# Altium PCB UC-521.PcbDoc
Units mil, origin at the board's own origin, x right, y up, seen from the top; angles counter-clockwise.
Board outline 1574.8 x 1574.8 mil, 4 copper layers (Top Layer, VCC_3.3V, InternalPlane2, Bottom Layer); 61 components, 37 nets, 286 pads, 160 vias.
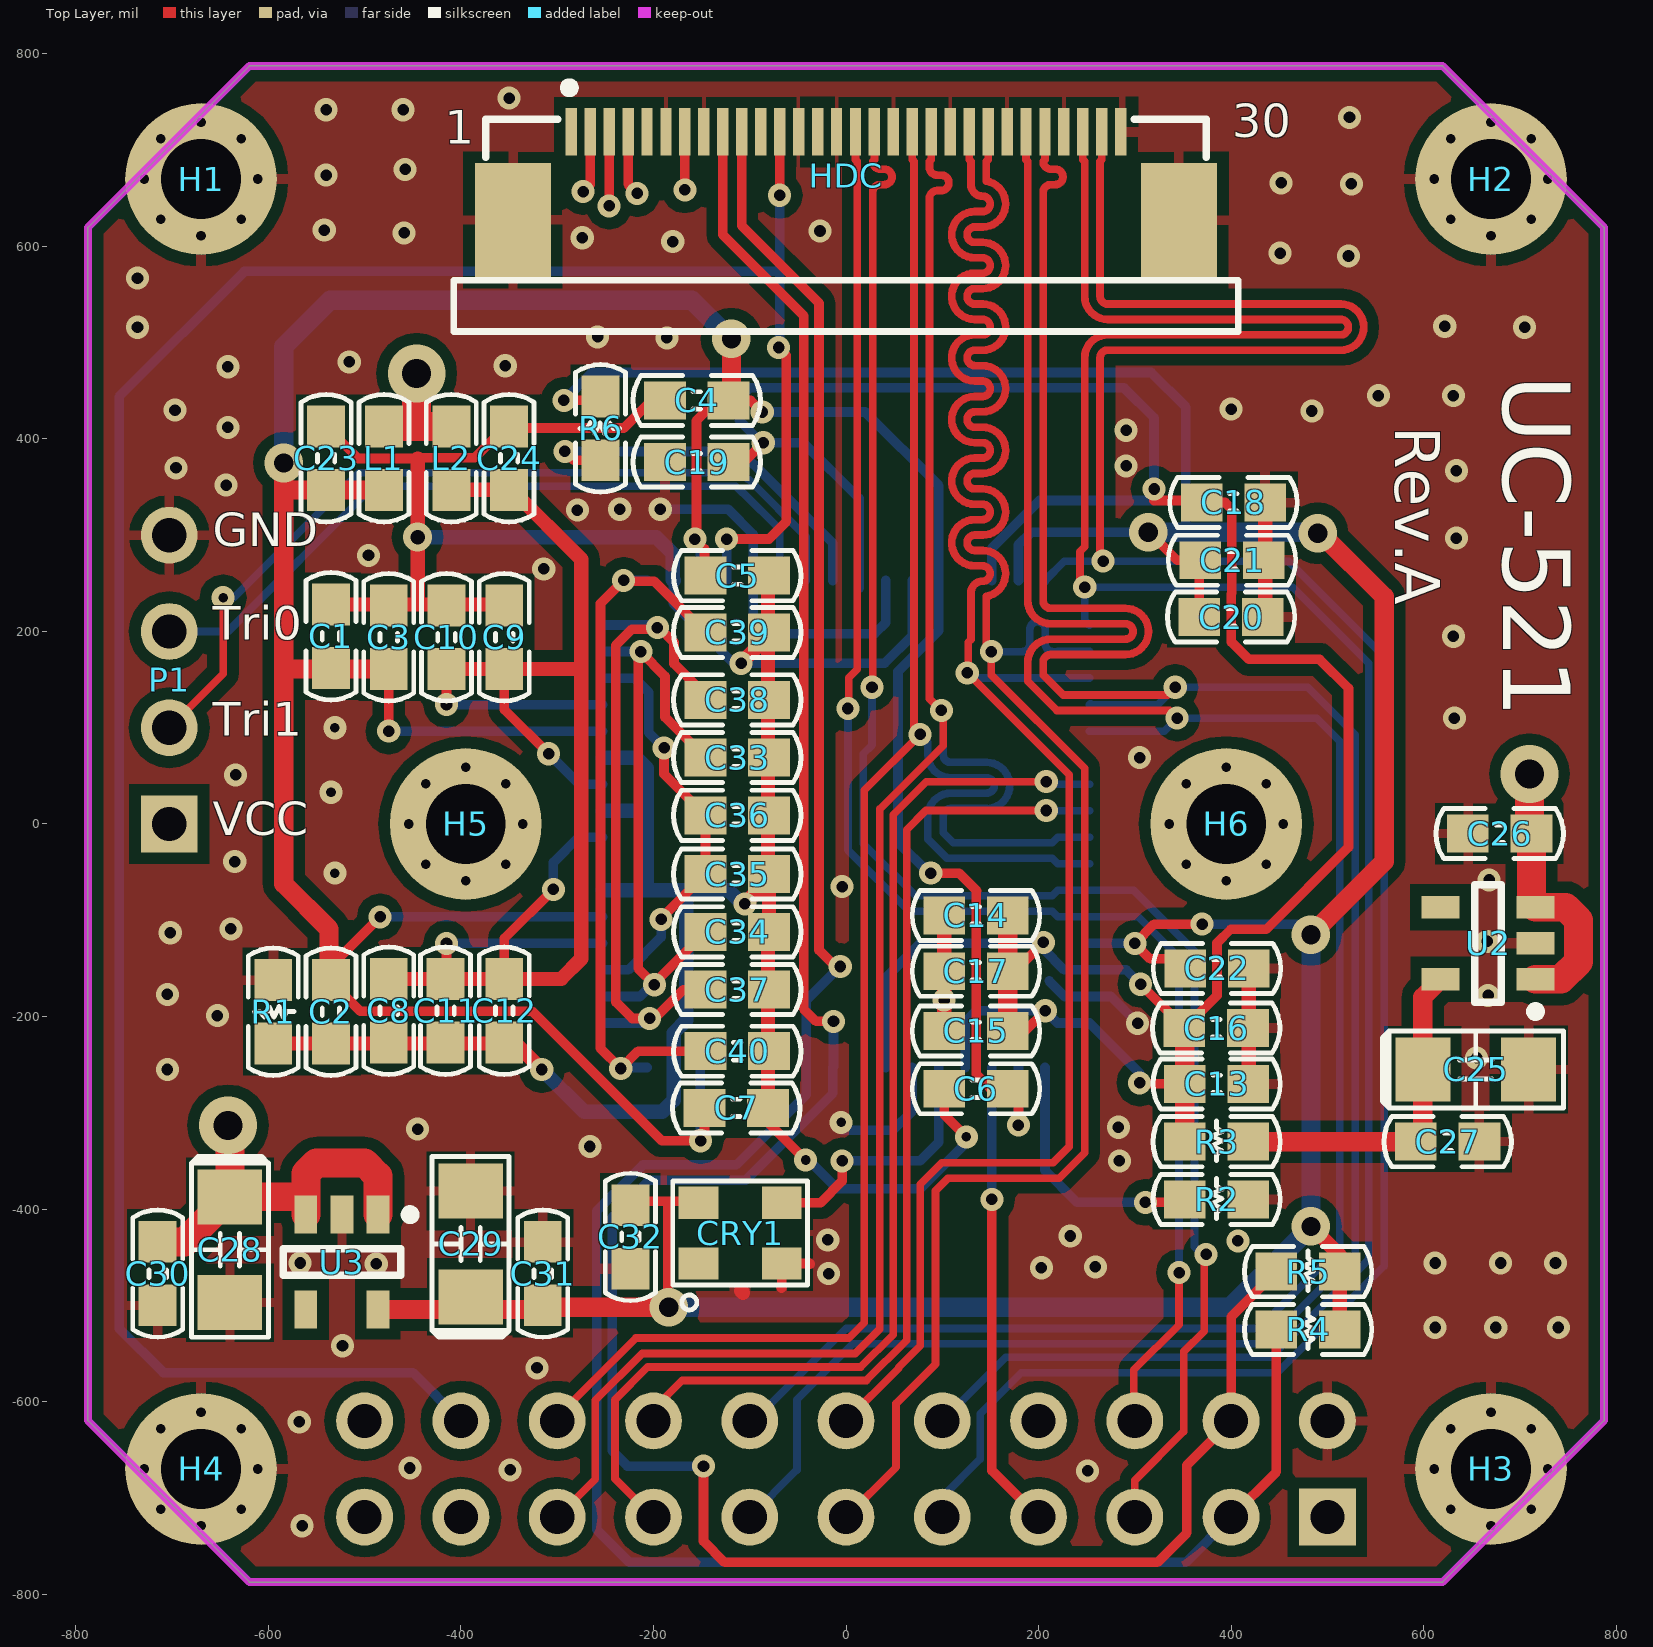
[diagram p0: Top Layer view]
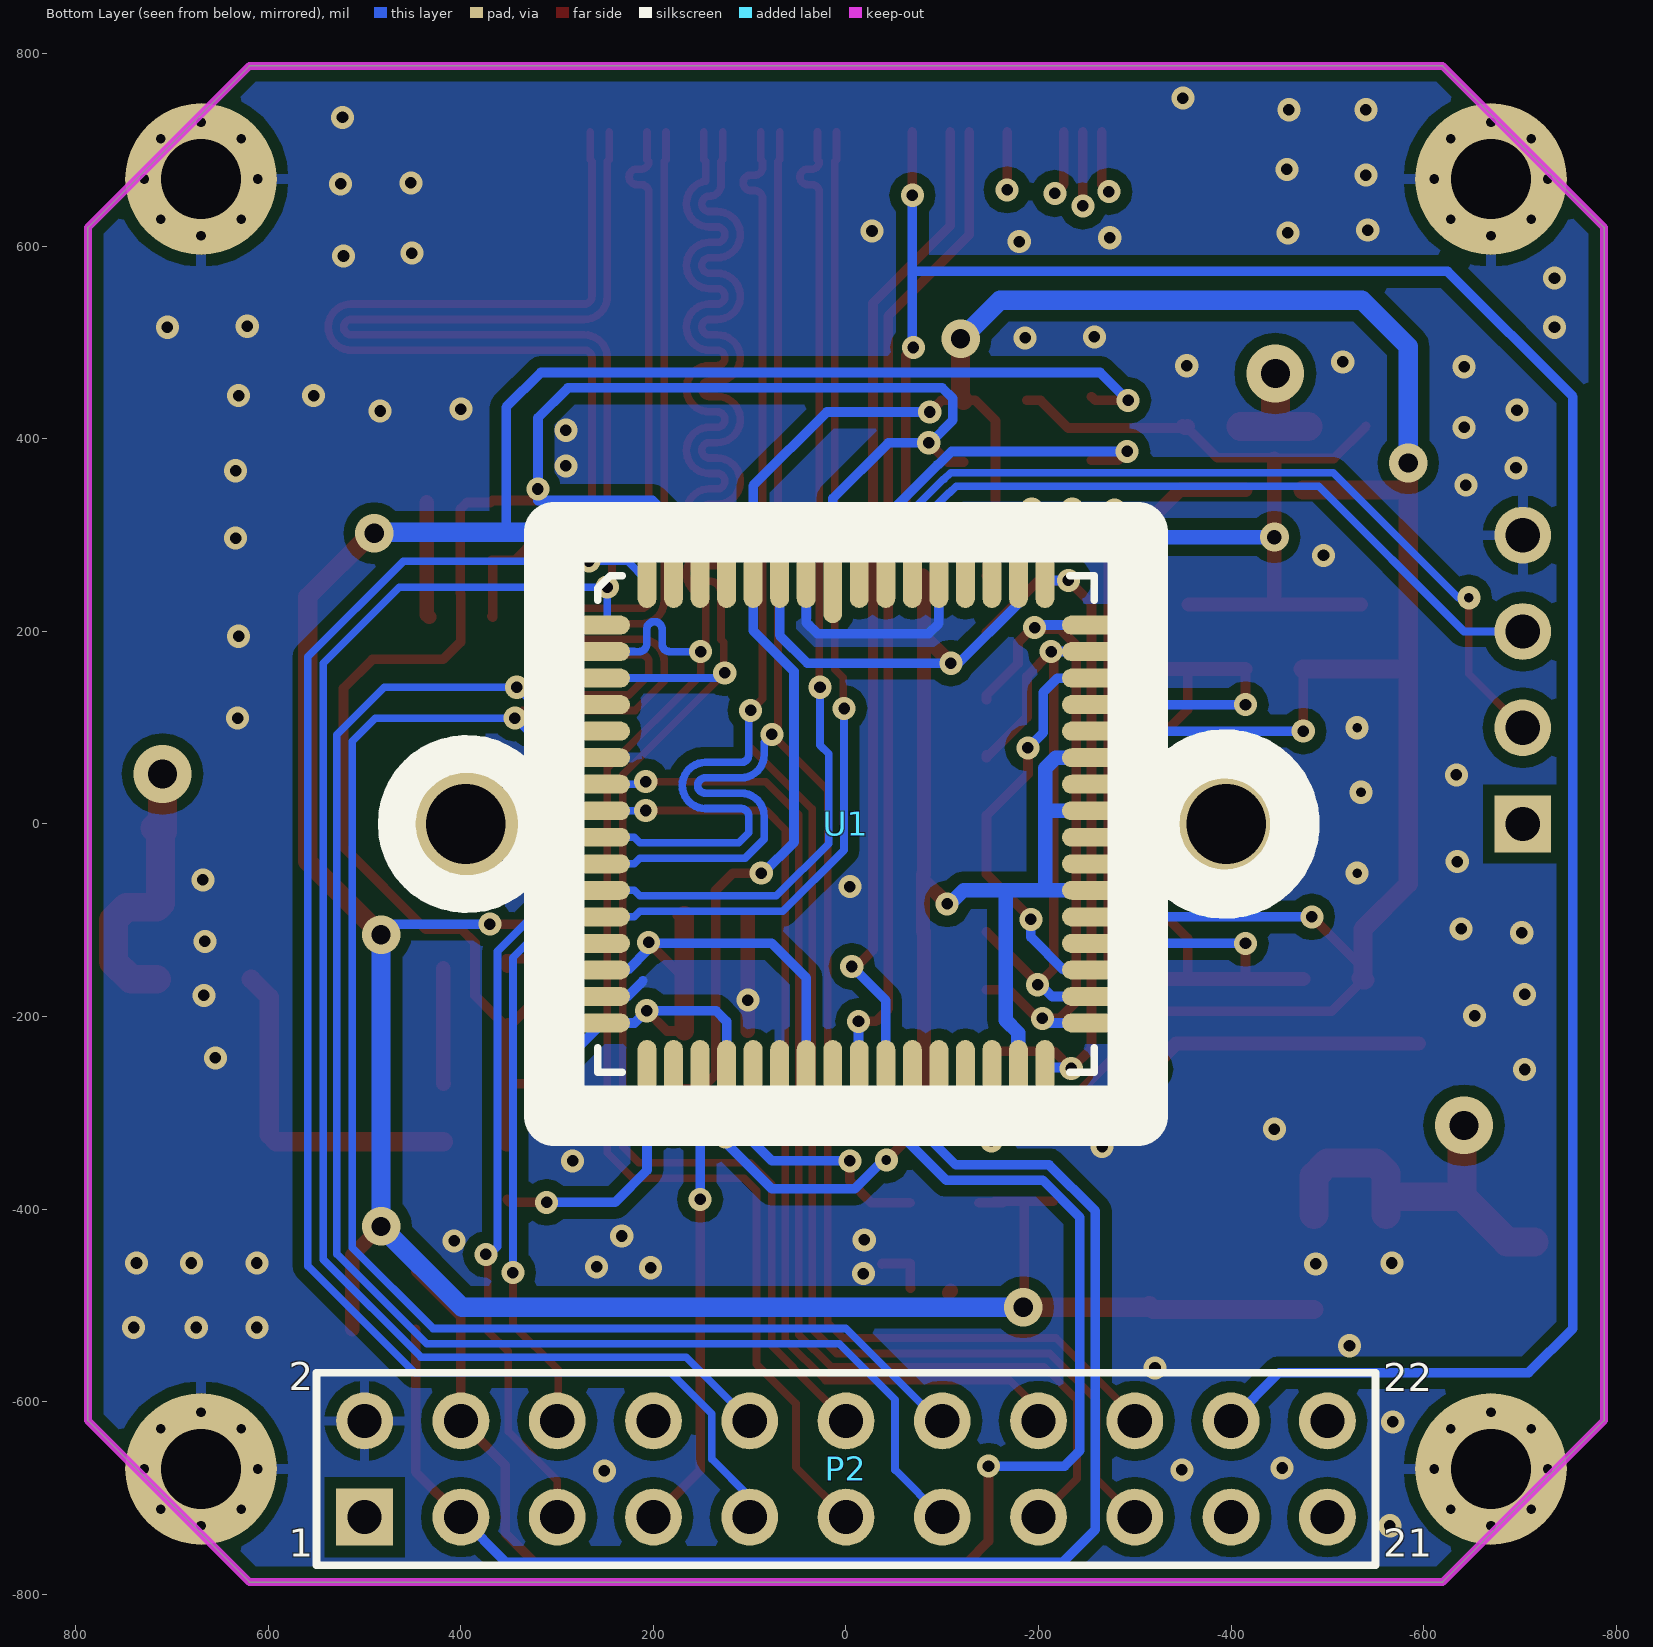
[diagram p1: Bottom Layer view, seen from below]
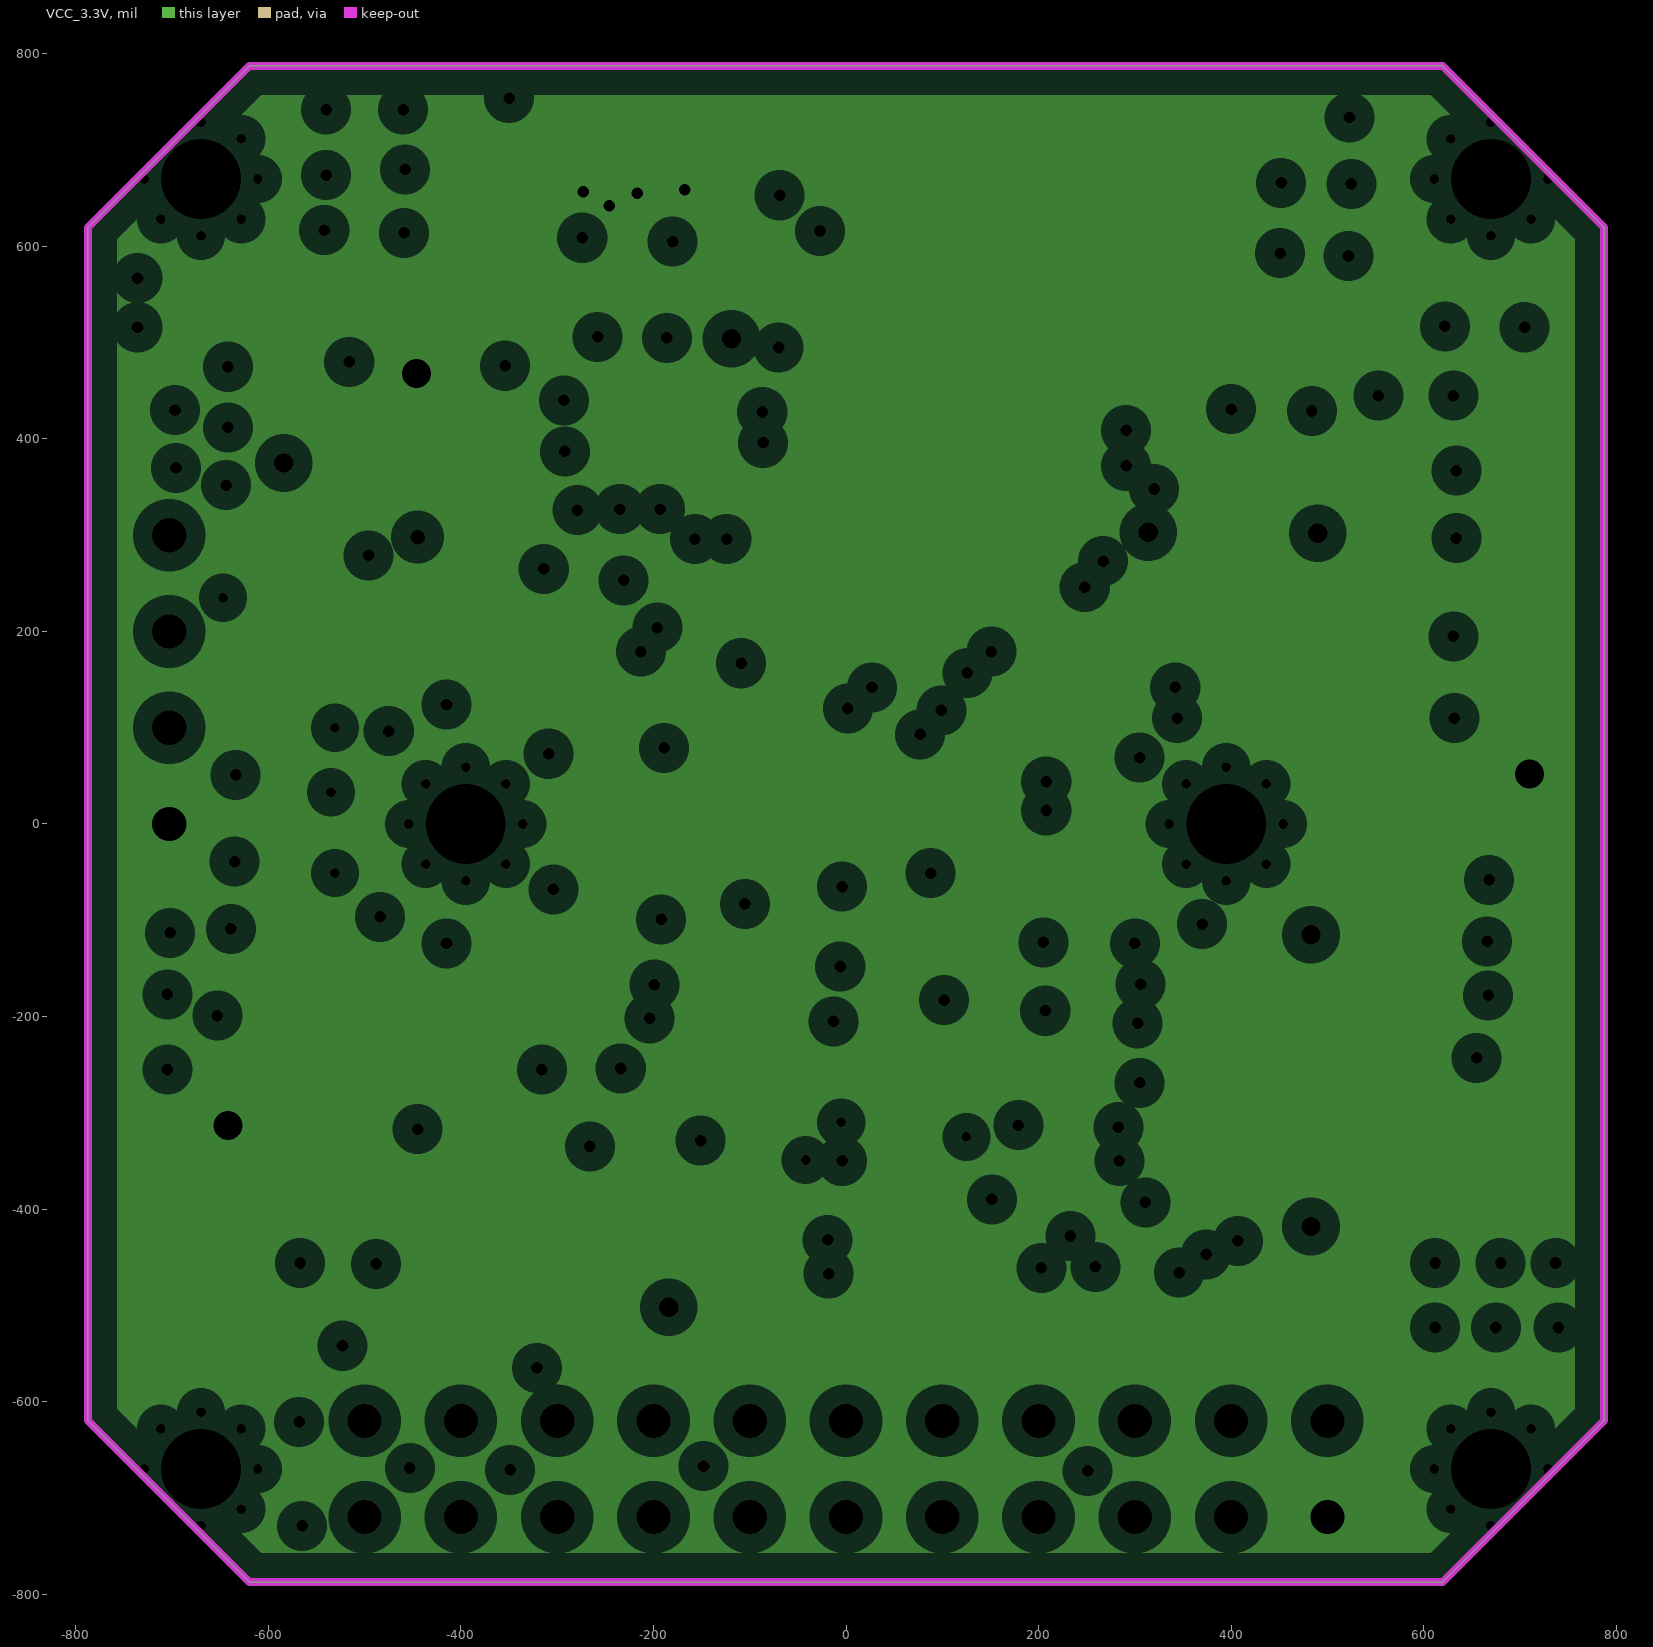
[diagram p2: VCC_3.3V, clearances drawn from the general rule]
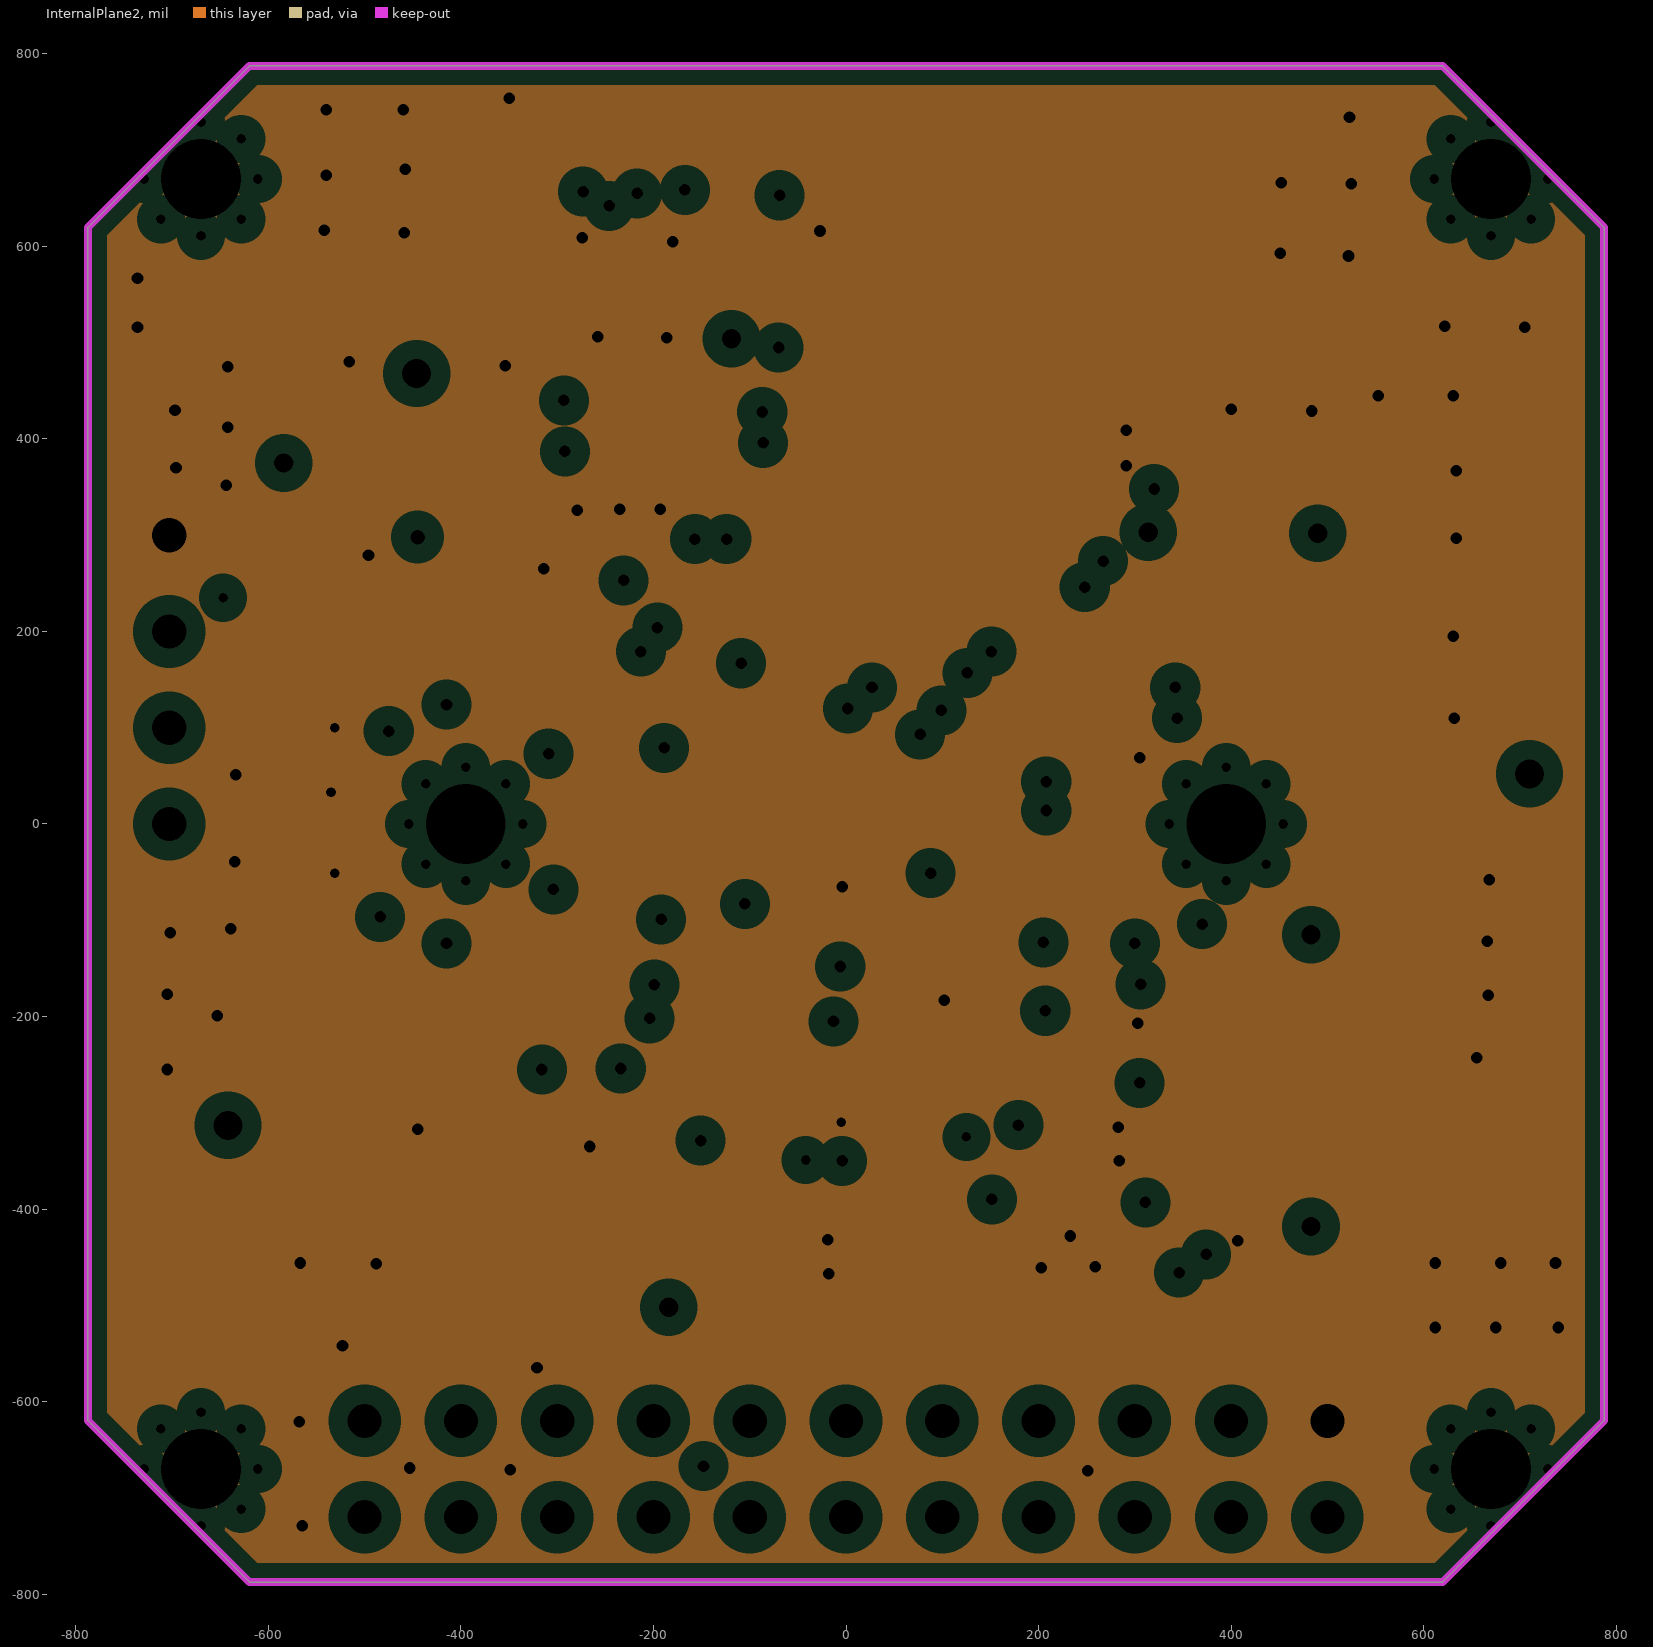
[diagram p3: InternalPlane2, clearances drawn from the general rule]

## Layer stack, top to bottom
Top Layer: signal copper 1.4
Dielectric: core 12.6, FR-4, Dk 4.8
VCC_3.3V: plane copper 1.4, net VCC_3.3V
Dielectric: prepreg 12.6, FR-4, Dk 4.8
InternalPlane2: plane copper 1.4, net DGND
Dielectric: core 12.6, FR-4, Dk 4.8
Bottom Layer: signal copper 1.4

## Board outline
-787.4,-619.68 -787.4,619.68 -619.68,787.4 619.69,787.4 787.4,619.68 787.4,-619.68 619.69,-787.4 -619.68,-787.4

## Design rules (kind name [scope] priority, off if disabled: settings)
Clearance 铺铜安全间距 [InPolygon] p1: gap=12 // Protel DXP Scope 1 Expression Was: inpolygon
Clearance [All] p2: gap=6
ComponentClearance [All] p1: gap=0 collisioncheckmode=3 verticalgap=10 showdistances=FALSE
DiffPairsRouting [All] p1: maxlimit=8 minlimit=8 mostfreqgap=8 maxuncoupledlength=500
FabricationTestPointUsage TestPointUsage [All] p1: valid=0 allowmultiple=FALSE
FabricationTestpoint Testpoint [All] p1 off: side=3 testpointundercomponent=TRUE minsize=40 maxsize=100 preferedsize=60 minholesize=0 maxholesize=40 preferedholesize=32 testpointgrid=1 allowsidetop=TRUE allowsidebottom=TRUE usegrid=TRUE gridtolerance=0.01 // Protel DXP Scope 1 Expression Was: (IsPad And (OnTopLayer Or OnBottomLayer))
FanoutControl Fanout_Small [All] p1 off: bgadir=Out bgaviamode=Centered fanoutstyle=Auto fanoutdirection=Alternating viagrid=1 // Protel DXP Scope 1 Expression Was: (CompPinCount < 5)   Fanout_Small (Default Rule)
FanoutControl Fanout_Default [All] p2: bgadir=Out bgaviamode=Centered fanoutstyle=Auto fanoutdirection=Alternating viagrid=1 // Fanout_Default (Default Rule)
FanoutControl Fanout_SOIC [All] p3 off: bgadir=Out bgaviamode=Centered fanoutstyle=Auto fanoutdirection=Alternating viagrid=1 // Protel DXP Scope 1 Expression Was: IsSOIC   Fanout_SOIC (Default Rule)
FanoutControl Fanout_BGA [All] p4 off: bgadir=Out bgaviamode=Centered fanoutstyle=Auto fanoutdirection=Alternating viagrid=1 // Protel DXP Scope 1 Expression Was: IsBGA   Fanout_BGA (Default Rule)
FanoutControl Fanout_LCC [All] p5 off: bgadir=Out bgaviamode=Centered fanoutstyle=Auto fanoutdirection=Alternating viagrid=1 // Protel DXP Scope 1 Expression Was: IsLCC   Fanout_LCC (Default Rule)
PlaneClearance [All] p1: clearance=20
PlaneConnect [All] p1: planeconnectstyle=Relief reliefexpansion=20 reliefentries=4 reliefconductorwidth=10 reliefairgap=10
PolygonConnect via [ISVIA] p1: connectstyle=Direct reliefconductorwidth=10 reliefentries=4 polygonreliefangle="90 Angle"
PolygonConnect PolygonConnect_1 [All] p2 off: connectstyle=Relief reliefconductorwidth=25 reliefentries=4 polygonreliefangle="90 Angle" // Protel DXP Scope 1 Expression Was: IsVia
RoutingVias [All] p1: holewidth=10 width=15 viastyle="Through Hole" minholewidth=8 minwidth=5 maxholewidth=280 maxwidth=500
SilkscreenOverComponentPads [All] p1: minsilkscreentomaskgap=10
SolderMaskExpansion [All] p1: expansion=4
Width [All] p1: maxlimit=100 minlimit=8 preferedwidth=8
16 further rules are at their usual default settings.

## Classes and differential pairs
differential pair CSI_D3: +CSI_D3_P -CSI_D3_N
differential pair CSI_D2: +CSI_D2_P -CSI_D2_N
differential pair CSI_D1: +CSI_D1_P -CSI_D1_N
differential pair CSI_D0: +CSI_D0_P -CSI_D0_N
differential pair CSI_C: +CSI_C_P -CSI_C_N

## Components (designator, comment, footprint, x,y, rotation, side; value= is the part's Value field where it differs from the comment)
C1 "10uF" C0603 -535,195 r270 top
C2 "100nF" C0603 -535,-195 r90 top
C3 "100nF" C0603 -475,194 r270 top
C4 "100nF" C0603 -155,440 r0 top
C5 "100nF" C0603 -113,257.95 r180 top
C6 "100nF" C0603 135,-275 r0 top
C7 "100nF" C0603 -114,-295 r180 top
C8 "10uF" C0603 -475,-194 r90 top
C9 "100nF" C0603 -355,194 r270 top
C10 "100nF" C0603 -415,194 r270 top
C11 "100nF" C0603 -416,-194 r90 top
C12 "100nF" C0603 -355,-194 r90 top
C13 "10uF" C0603 385,-270 r180 top
C14 "100nF" C0603 135,-95 r0 top
C15 "100nF" C0603 135,-215 r0 top
C16 "100nF" C0603 384.53,-212 r180 top
C17 "100nF" C0603 135,-153 r0 top
C18 "100nF" C0603 402.47,334 r180 top
C19 "100nF" C0603 -155,376 r0 top
C20 "10uF" C0603 400,215 r180 top
C21 "100nF" C0603 401,274 r180 top
C22 "100nF" C0603 385.35,-150 r180 top
C23 "22uF" C0603 -540,380 r90 top
C24 "22uF" C0603 -350,380 r90 top
C25 "10uF/16V" 钽电容（A型） 654.18,-255 r0 top (schematic designator C4)
C26 "0.1uF" C0603 679,-10 r0 top (schematic designator C7)
C27 "100nF" C0603 625,-330 r180 top (schematic designator C5)
C28 "10uF/16V" 钽电容（A型） -640,-442.24 r270 top
C29 "10uF/16V" 钽电容（A型） -390,-436.24 r90 top
C30 "100nF" C0603 -715,-467.05 r90 top (schematic designator C9)
C31 "100nF" C0603 -315,-467.05 r270 top (schematic designator C11)
C32 "100nF" C0603 -224,-429 r90 top
C33 "100nF" C0603 -113,69 r180 top
C34 "100nF" C0603 -113,-112 r180 top
C35 "100nF" C0603 -113,-52 r180 top
C36 "100nF" C0603 -113,9 r180 top
C37 "100nF" C0603 -113,-172 r180 top
C38 "100nF" C0603 -113,129 r180 top
C39 "100nF" C0603 -113,199 r180 top
C40 "100nF" C0603 -113,-236 r180 top
CRY1 "25M" 爱普生晶振3.2×2.5MM -110,-425 r0 top
H1 "FixedHole" HOLE_M2#1 -670,670 r90 top
H2 "FixedHole" HOLE_M2#1 670,670 r90 top
H3 "FixedHole" HOLE_M2#1 670,-670 r90 top
H4 "FixedHole" HOLE_M2#1 -670,-670 r90 top
H5 "FixedHole" HOLE_M2#2 -395,0 r90 top
H6 "FixedHole" HOLE_M2#2 395,0 r90 top
HDC "Component_1" FH12-30S-0.5SH 0,673.29 r0 top locked (schematic designator HDC1)
L1 "磁珠" L0603 -480,380 r90 top
L2 "磁珠" L0603 -410,380 r270 top
P1 "Header 4" HDR1X4 -703,0 r90 top
P2 "Header 11X2" HDR2X11 500,-720 r180 bottom locked (schematic designator P1)
R1 "0" R0603 -595,-195 r90 top
R2 "4.7K" R0603 385,-390 r180 top
R3 "0" R0603 385,-330 r180 top
R4 "4.7K" R0603 480,-525 r180 top
R5 "4.7K" R0603 480,-465 r180 top
R6 "4.7K" R0603 -255,411 r270 top
U1 "SC130GS" LCC64-SC130GS 0,0 r180 bottom locked
U2 "1.5VLDO" SOT23-5 666.97,-123.93 r180 top
U3 "1.8VLDO" SOT23-5 -523.67,-455.03 r270 top

## Footprints (in the part's own frame and the unit in brackets; to place one, negate y for a bottom-side part, rotate by r counter-clockwise, add the part's x,y. Pads: shape width x height; smd on the part's side, far side on the other; paste and mask are expansions set on the pad)
C0603 [mm]
  rect 1.1x1 smd: 1(0.838,0) 2(-0.838,0)
  silkscreen extent -1.68,-0.66 1.68,0.66
FH12-30S-0.5SH [mm] "Connector; FH12 Series; 20 Position; 0.5mm Spaced Bottom Contact"
  rect 0.3x1.25 smd: 1(-7.25,1.162) 2(-6.75,1.162) 3(-6.25,1.162) 4(-5.75,1.162) 5(-5.25,1.162) 6(-4.75,1.162) 7(-4.25,1.162) 8(-3.75,1.162) 9(-3.25,1.162) 10(-2.75,1.162) 11(-2.25,1.162) 12(-1.75,1.162) 13(-1.25,1.162) 14(-0.75,1.162) 15(-0.25,1.162) 16(0.25,1.162) 17(0.75,1.162) 18(1.25,1.162) 19(1.75,1.162) 20(2.25,1.162) 21(2.75,1.162) 22(3.25,1.162) 23(3.75,1.162) 24(4.25,1.162) 25(4.75,1.162) 26(5.25,1.162) 27(5.75,1.162) 28(6.25,1.162) 29(6.75,1.162) 30(7.25,1.162)
  rect 2x3 smd: 31(-8.79,-1.163) 31(8.79,-1.163)
  silkscreen extent -10.35,-4.11 10.35,2.45
HDR1X4 [mm] "Connector; Header; 4 Position"
  rect 1.5x1.5 hole 0.9: 1(0,0)
  round 1.5 hole 0.9: 2(2.54,0) 3(5.08,0) 4(7.62,0)
HDR2X11 [mm] "Connector; Header; 11x2 Position"
  rect 1.5x1.5 hole 0.9: 1(0,0)
  round 1.5 hole 0.9: 2(0,2.54) 3(2.54,0) 4(2.54,2.54) 5(5.08,0) 6(5.08,2.54) 7(7.62,0) 8(7.62,2.54) 9(10.16,0) 10(10.16,2.54) 11(12.7,0) 12(12.7,2.54) 13(15.24,0) 14(15.24,2.54) 15(17.78,0) 16(17.78,2.54) 17(20.32,0) 18(20.32,2.54) 19(22.86,0) 20(22.86,2.54) 21(25.4,0) 22(25.4,2.54)
  silkscreen extent -1.27,-1.27 26.67,3.81
HOLE_M2#1 [mil]
  round 15 hole 10: 0(-59.06,0) 0(-41.73,-41.73) 0(-41.73,41.73) 0(0,59.06) 0(0,-59.06) 0(41.73,-41.73) 0(41.73,41.73) 0(59.06,0)
  round 157.48 hole 82.68: 0(0,0)
HOLE_M2#2 [mil]
  round 15 hole 10: 0(-59.06,0) 0(-41.73,-41.73) 0(-41.73,41.73) 0(0,59.06) 0(0,-59.06) 0(41.73,-41.73) 0(41.73,41.73) 0(59.06,0)
  round 157.48 hole 82.68: 1(0,0)
L0603 [mm]
  rect 1.1x1 smd: 1(0.838,0) 2(-0.838,0)
  silkscreen extent -1.68,-0.66 1.68,0.66
LCC64-SC130GS [mm] "LCC, 64-Pins, Body 13.1x13.1mm (max), Pitch 0.70mm, IPC Medium Density"
  oval 0.5x1.85 smd: 1(-0.35,6.225)
  oval 0.5x1.45 smd: 2(-1.05,6.425) 3(-1.75,6.425) 4(-2.45,6.425) 5(-3.15,6.425) 6(-3.85,6.425) 7(-4.55,6.425) 8(-5.25,6.425) 25(-5.25,-6.425) 26(-4.55,-6.425) 27(-3.85,-6.425) 28(-3.15,-6.425) 29(-2.45,-6.425) 30(-1.75,-6.425) 31(-1.05,-6.425) 32(-0.35,-6.425) 33(0.35,-6.425) 34(1.05,-6.425) 35(1.75,-6.425) 36(2.45,-6.425) 37(3.15,-6.425) 38(3.85,-6.425) 39(4.55,-6.425) 40(5.25,-6.425) 57(5.25,6.425) 58(4.55,6.425) 59(3.85,6.425) 60(3.15,6.425) 61(2.45,6.425) 62(1.75,6.425) 63(1.05,6.425) 64(0.35,6.425)
  oval 1.45x0.5 smd: 9(-6.425,5.25) 10(-6.425,4.55) 11(-6.425,3.85) 12(-6.425,3.15) 13(-6.425,2.45) 14(-6.425,1.75) 15(-6.425,1.05) 16(-6.425,0.35) 17(-6.425,-0.35) 18(-6.425,-1.05) 19(-6.425,-1.75) 20(-6.425,-2.45) 21(-6.425,-3.15) 22(-6.425,-3.85) 23(-6.425,-4.55) 24(-6.425,-5.25) 41(6.425,-5.25) 42(6.425,-4.55) 43(6.425,-3.85) 44(6.425,-3.15) 45(6.425,-2.45) 46(6.425,-1.75) 47(6.425,-1.05) 48(6.425,-0.35) 49(6.425,0.35) 50(6.425,1.05) 51(6.425,1.75) 52(6.425,2.45) 53(6.425,3.15) 54(6.425,3.85) 55(6.425,4.55) 56(6.425,5.25)
  silkscreen extent -6.55,-6.55 6.55,7.82
R0603 [mm]
  rect 1.1x1 smd: 1(-0.838,0) 2(0.838,0)
  silkscreen extent -1.68,-0.66 1.68,0.66, body extent -0.8,-0.4 0.8,0.4, height 0.3
SOT23-5 [mm] "SOT23, 5-Leads, Body 3.1x3.0mm (max), Pitch 0.95mm, IPC Medium Density"
  rect 1x0.6 smd: 1(-1.25,0.95) 2(-1.25,0) 3(-1.25,-0.95) 4(1.25,-0.95) 5(1.25,0.95)
  silkscreen extent -1.38,-1.55 0.35,1.92, body extent -0.9,-1.55 0.9,1.55, height 1.1
爱普生晶振3.2×2.5MM [mm]
  rect 1.05x0.85 smd: 1(-1.1,-0.8) 2(1.1,-0.8) 3(1.1,0.8) 4(-1.1,0.8)
  Top Layer pour cut-out: -1.778,1.372 -1.778,-1.372 1.778,-1.372 1.778,1.372
  silkscreen extent -1.78,-2.03 1.78,1.37
钽电容（A型） [mm]
  rect 1.45x1.7 smd: 1(-1.397,0) 2(1.397,0)
  silkscreen extent -2.46,-1.02 2.31,1.02

## Part data
C1 C2 C3 C4 C5 C6 C7 C8 C9 C10 C11 C12 C13 C14 C15 C16 C17 C18 C19 C20 C21 C22 C32 C33 C34 C35 C36 C37 C38 C39 C40: library part Cap, "50V/8.2u/0805"
C23 C24 C26 C27 C30 C31: library part Cap, "Capacitor"
C25 C28 C29: library part "Cap Pol2", "Polarized Capacitor (Axial)"
CRY1: library part 24M
H1 H2 H3 H4 H5 H6: library part 固定孔
L1 L2: library part RES
P1: "Header, 4-Pin"
P2: "Header, 11-Pin, Dual row"
R1 R2 R3 R4 R5 R6: library part Res2, "Resistor"
U2 U3: library part 2.8VLDO

## Via types
v1: diameter 24, hole 12, Top Layer to Bottom Layer, tented both sides, 142 vias
v2: diameter 24, hole 10, Top Layer to Bottom Layer, tented both sides, 7 vias
v3: diameter 40, hole 20, Top Layer to Bottom Layer, tented both sides, 7 vias
v4: diameter 60, hole 30, Top Layer to Bottom Layer, tented both sides, 3 vias
v5: diameter 30, hole 15, Top Layer to Bottom Layer, tented both sides, 1 vias

## Nets (pads, with @x,y where several pads share a name; then routed paths per layer and width w, separated by ;. In a path a pad name is that pad's centre, name@x,y a point inside that pad or via, vN(x,y) a via of type N, cw(c..) or ccw(c..) an arc to the next point about the centre after c; other vN are vias at no path point)
1.5V: C25.1 C27.1 R3.1 U2.5 | length 353.3
  Top Layer w20: R3.1 C27.1 599.18,-322.82 C25.1 599.18,-179.91 U2.5
AGND: C1.2 C2.2 C3.2 C4.2 C5.2 C6.2 C7.2 C8.2 C9.2 C10.2 C11.2 C12.2 C23.1 C24.1 C33.2 C34.2 C35.2 C36.2 C37.2 C38.2 C39.2 C40.2 R1.1 U1.3 U1.39 U1.46 U1.49 U1.51 U1.58 | length 3413.7
  Top Layer w10: C23.1 -506.65,379.65 -445,379.65 -444.31,380.35 -385.76,380.35 -354.76,411.35 -230.76,411.35 -202.11,440 C4.2 ; C7.2@-69,-295 C7.2 -81,-310 v2(-42,-349) ; C6.2 102,-302 v2(125,-325)
  Top Layer w15: R1.1 C2.2 -343,-228 v1(-316,-255) ; C1.2 -445,228 ; -445,379.65 v5(-445,298) -445,228 ; C9.2@-356,228 -445,228 ; C24.1@-355,413 -353.35,411.35 -351.65,411.35 C24.1 ; v1(-109,167) C39.2@-81,195 ; v1(-105,-83) C35.2@-80,-58 ; C7.2 C34.2@-81,-112 ; C35.2@-81,-52 C39.2@-81,195 ; C34.2 C35.2@-80,-58 ; C35.2 C35.2@-80,-58 ; C5.2 -81,256.95 C39.2@-81,195
  Bottom Layer w10: U1.58 -179.13,229.13 -117,167 v1(-109,167) 40,167 68.9,195.9 U1.3 ; v2(-42,-349) -39,-349 -9,-379 77,-379 125,-331 v2(125,-325)
  Bottom Layer w15: v5(-445,298) -197,298 -180,281 -180,253.82 U1.58 ; v1(-316,-255) -272,-299 -191,-299 -179.13,-287.13 U1.39 -179.13,-217.13 -166,-204 -166,-68.9 ; U1.46 -207,-68.9 ; U1.49 -207.22,13.78 ; U1.51 -217.9,68.9 -207,58 -207,-68.9 ; v1@-111,-80 -122.1,-68.9 -166,-68.9 ; -207,-68.9 -166,-68.9
AVDD_3.3V: C1.1 C2.1 C3.1 C4.1 C5.1 C6.1 C7.1 C23.2 L1.2 U1.4 U1.26 U1.38 U1.45 U1.52 U1.59 | length 3959.1
  Top Layer w10: C2.1@-539,-162 -537,-160 C2.1@-535,-158 ; C2.1@-537,-162 -504.65,-194.35 -326.18,-194.35 -191.53,-329 v1(-151,-329) -147,-325 C7.1 C7.1@-151,-299 ; C2.1 -535,-160 C2.1@-535,-158 ; v1(-484,-96.46) -535,-147.46 C2.1@-535,-158 ; v1(-475,96.46) C3.1 ; v1(-157,296) -155.35,297.65 -155.35,419 -134.35,440 C4.1 ; -147.02,286.02 -147.02,258.97 C5.1 ; C4.1@-106,440 C4.1 ; v1(-87,428) -99,440 C4.1 ; v1(88,-51) 117.55,-51 136,-69.45 135.35,-70.11 135.35,-260.35 150,-275 C6.1 ; v1(179.13,-312.87) C6.1@179.13,-286.13
  Top Layer w20: v3(-584,375) -584,161 ; -573,347 L1.2@-475,347 ; C2.1@-539,-162 C2.1@-537,-162 ; C2.1@-535,-160 C2.1@-537,-162 ; C3.1 -584,161 ; C4.1 -119,443 v3(-119,504) ; -584,161 -584,-62 -537,-109 -537,-160 C2.1@-537,-162
  Bottom Layer w10: v1(-484,-96.46) U1.45 ; v1(-475,96.46) U1.52 ; v1(-157,296) -151.57,290.57 U1.59 U1.59@-148,256.53 ; v1@-151.57,-328.43 U1.38 ; v1(-87,428) 19.91,428 96.46,351.46 U1.4 96.46,200.83 54,158.37 54,-19 v1@86,-51 ; v1(179.13,-312.87) U1.26
  Bottom Layer w20: v3(-584,375) -584,496 -536,544 -160,544 -120,504 v3(-119,504)
CAM_D2: P2.16 U1.16 | length 1033.2
  Top Layer w8: P2.16 -200,-608 -170,-578 21.23,-578 63,-536.23 63,-6 83,14 v1(208,14)
  Bottom Layer w8: v1@208,13.78 U1.16
CAM_D3: P2.15 U1.15 | length 1311.8
  Top Layer w8: P2.15 -240,-680 -240,-598 -206,-564 15.43,-564 49,-530.43 49,-136 ; 49,-234 49,-136 ; v1(208,44) 83.32,44 49,9.68 49,-136
  Bottom Layer w8: v1@208,41.34 U1.15
CAM_EXP: P2.21
CAM_LED: P2.22
CAM_PCK: P2.7 U1.27 | length 487.1
  Top Layer w10: v1(151.57,-390) 151.57,-671.57 P2.7
  Bottom Layer w10: v1(151.57,-390) U1.27
CAM_RESET: P2.19
CAM_XCLK: P2.8
CAMIF_EN: HDC.12 P2.20 U1.60 | length 2611.2
  Top Layer w10: v1(-124.02,296) -80,296 -62,314 v1@-62,487 ; v1(-68.9,653.1) HDC.12
  Bottom Layer w10: P2.20 -450,-570 -709,-570 -755,-524 -755,444 -625,574 -68.9,574 ; U1.60 v1(-124.02,296) ; v1@-68.9,496.1 v1(-68.9,653.1)
  other v1: -70,495
CSI_C_N: HDC.26 P2.13 U1.12 | length 2548.3
  Top Layer w8: 204.85,688.16 ccw(c212.85,688.16) 212.85,680.16 217.36,680.16 cw(c217.36,672.16) 225.36,672.16 cw(c217.36,672.16) 217.36,664.16 212.85,664.16 ccw(c212.85,656.16) 204.85,656.16 204.85,595 204.85,232 ccw(c212.85,232) 212.85,224 290.22,224 cw(c290.22,200) 314.22,200 cw(c290.22,200) 290.22,176 212.85,176 ccw(c212.85,168) 204.85,168 204.85,154.78 225.63,134 v1@334,134 ; 206.69,690 HDC.26
  Bottom Layer w8: P2.13 -51,-671 -51,-598 7,-540 435.63,-540 529,-446.63 529,92.63 479.63,142 v1(342,142) 324.02,124.02 U1.12 U1.12@253.94,125
CSI_C_P: HDC.25 P2.14 U1.13 | length 2409.1
  Top Layer w8: 187.01,690 HDC.25 ; 188.85,688.16 188.85,595 188.85,232 ccw(c212.85,232) 212.85,208 290.22,208 cw(c290.22,200) 298.22,200 cw(c290.22,200) 290.22,192 212.85,192 ccw(c212.85,168) 188.85,168 188.85,148.15 219,118 v1@336,118
  Bottom Layer w8: P2.14 -95.63,-620 0.37,-524 429,-524 513,-440 513,86 489,110 v1(344,110) 330.46,96.46 U1.13
CSI_D0_N: HDC.29 P2.9 U1.8 | length 2603.9
  Top Layer w8: v1@263.91,276.09 263.91,484.16 cw(c271.91,484.16) 271.91,492.16 513.83,492.16 ccw(c513.83,516.16) 537.83,516.16 ccw(c513.83,516.16) 513.83,540.16 271.91,540.16 cw(c271.91,548.16) 263.91,548.16 263.91,688.16 ; 265.75,690 HDC.29
  Bottom Layer w8: P2.9 100,-699.06 139.53,-659.53 139.53,-612.47 182,-570 448.05,-570 559,-459.05 559,173.63 459.63,273 v1(267,273) 226.74,273 U1.8 ; U1.8@206.69,251.69 U1.8@206.69,252.69
CSI_D0_P: HDC.28 P2.10 U1.9 | length 2489.6
  Top Layer w8: v1@243,251 243,282.94 247.91,287.85 247.91,484.16 cw(c271.91,484.16) 271.91,508.16 513.83,508.16 ccw(c513.83,516.16) 521.83,516.16 ccw(c513.83,516.16) 513.83,524.16 271.91,524.16 cw(c271.91,548.16) 247.91,548.16 247.91,688.16 ; 246.06,690 HDC.28
  Bottom Layer w8: P2.10 166,-554 441.43,-554 543,-452.43 543,167 464,246 v1(248,246) 248,211.65 U1.9
CSI_D1_N: HDC.23 P2.11 U1.10 | length 2138.4
  Top Layer w8: P2.11 52,-668 52,-602 93,-561 93,-381 106,-368 221.63,-368 248,-341.63 248,57.74 151,154.74 v1(151,179) 145.8,184.2 145.8,236.49 ccw(c141.8,260.16) 165.8,260.16 ccw(c141.8,260.16) 141.8,284.16 133.8,284.16 cw(c133.8,292.16) 133.8,300.16 141.8,300.16 ccw(c141.8,324.16) 165.8,324.16 ccw(c141.8,324.16) 141.8,348.16 133.8,348.16 cw(c133.8,356.16) 133.8,364.16 141.8,364.16 ccw(c141.8,388.16) 165.8,388.16 ccw(c141.8,388.16) 141.8,412.16 133.8,412.16 cw(c133.8,420.16) 133.8,428.16 141.8,428.16 ccw(c141.8,452.16) 165.8,452.16 ccw(c141.8,452.16) 141.8,476.16 133.8,476.16 cw(c133.8,484.16) 133.8,492.16 141.8,492.16 ccw(c141.8,516.16) 165.8,516.16 ccw(c141.8,516.16) 141.8,540.16 133.8,540.16 cw(c133.8,548.16) 133.8,556.16 141.8,556.16 ccw(c141.8,580.16) 165.8,580.16 ccw(c141.8,580.16) 141.8,604.16 133.8,604.16 cw(c133.8,612.16) 133.8,620.16 141.8,620.16 ccw(c141.8,644.16) 165.8,644.16 ccw(c141.8,644.16) 145.8,667.82 145.8,688.16 147.64,690 HDC.23
  Bottom Layer w8: v1(151,179) 183,179 ccw(c183,187) 191,187 191,202.17 cw(c199,202.17) 199,210.17 cw(c199,202.17) 207,202.17 207,187 ccw(c215,187) 215,179 219.87,179 220,179.13 U1.10
CSI_D1_P: HDC.22 P2.12 U1.11 | length 2022.6
  Top Layer w8: P2.12 54.8,-565.2 54.8,-564.22 77,-542.02 77,-374.37 99.37,-352 215,-352 232,-335 232,51.11 v1@126.11,157 ; v1@121,152 v1(126,157) ; v1@126.11,150.26 v1@126.11,157 ; HDC.22 127.95,690 129.8,688.16 129.8,664.16 ccw(c141.8,664.16) 141.8,652.16 cw(c141.8,644.16) 149.8,644.16 cw(c141.8,644.16) 141.8,636.16 133.8,636.16 ccw(c133.8,612.16) 133.8,588.16 141.8,588.16 cw(c141.8,580.16) 149.8,580.16 cw(c141.8,580.16) 141.8,572.16 133.8,572.16 ccw(c133.8,548.16) 133.8,524.16 141.8,524.16 cw(c141.8,516.16) 149.8,516.16 cw(c141.8,516.16) 141.8,508.16 133.8,508.16 ccw(c133.8,484.16) 133.8,460.16 141.8,460.16 cw(c141.8,452.16) 149.8,452.16 cw(c141.8,452.16) 141.8,444.16 133.8,444.16 ccw(c133.8,420.16) 133.8,396.16 141.8,396.16 cw(c141.8,388.16) 149.8,388.16 cw(c141.8,388.16) 141.8,380.16 133.8,380.16 ccw(c133.8,356.16) 133.8,332.16 141.8,332.16 cw(c141.8,324.16) 149.8,324.16 cw(c141.8,324.16) 141.8,316.16 133.8,316.16 ccw(c133.8,292.16) 133.8,268.16 141.8,268.16 cw(c141.8,260.16) 149.8,260.16 cw(c141.8,260.16) 141.8,252.16 ccw(c141.8,240.16) 129.8,240.16 129.8,191.74 127,188.94 127,158 v1(126,157) ; v1(126,157) v1@126.11,157
  Bottom Layer w8: v1@131.43,151.57 U1.11
CSI_D2_N: HDC.20 P2.17 U1.17 | length 2165.2
  Top Layer w8: P2.17 -260.47,-680.47 -260.47,-598.67 -211.8,-550 9.63,-550 35,-524.63 35,15.48 101,81.48 101,116 v1(99,118) 86.74,130.26 86.74,650 cw(c94.74,650) 94.74,658 98.86,658 ccw(c98.86,666) 106.86,666 ccw(c98.86,666) 98.86,674 94.74,674 cw(c94.74,682) 86.74,682 86.74,688.16 88.58,690 HDC.20
  Bottom Layer w8: v1(99,118) 101,116 101,72 ccw(c109,72) 109,64 146.03,64 cw(c146.03,40) 170.03,40 cw(c146.03,40) 146.03,16 109,16 ccw(c109,8) 101,8 101,-9 111.56,-19.56 214.22,-19.56 220,-13.78 U1.17
CSI_D2_P: HDC.19 P2.18 U1.18 | length 2029.4
  Top Layer w8: P2.18 -300,-615.57 -218.43,-534 3,-534 19,-518 19,35 v1(77,93) 70.74,99.26 70.74,688.16 68.9,690 HDC.19
  Bottom Layer w8: v1(77,93) 85,85 85,72 ccw(c109,72) 109,48 146.03,48 cw(c146.03,40) 154.03,40 cw(c146.03,40) 146.03,32 109,32 ccw(c109,8) 85,8 85,-15.63 104.93,-35.56 214.22,-35.56 220,-41.34 U1.18
CSI_D3_N: HDC.17 P2.5 U1.19 | length 1793.2
  Top Layer w8: v1(27,142) 27.69,142.69 27.69,656.16 cw(c35.69,656.16) 35.69,664.16 39.81,664.16 ccw(c39.81,672.16) 47.81,672.16 ccw(c39.81,672.16) 39.81,680.16 35.69,680.16 cw(c35.69,688.16) 27.69,688.16 29.53,690 HDC.17 ; P2.5 300,-682 351,-631 351,-548 372,-527 372,-449 v1(374,-447)
  Bottom Layer w8: v1(27,142) 27,82 18,73 18,-20.37 72.3,-74.68 214.22,-74.68 220,-68.9 U1.19 298.64,-68.9 362,-132.26 362,-439 372,-449 v1(374,-447)
CSI_D3_P: HDC.16 P2.6 U1.20 | length 1642.2
  Top Layer w8: v1(2,120) 3,121 3,151.94 11.69,160.63 11.69,688.16 9.84,690 HDC.16 ; P2.6 299,-619 299,-567 346,-520 v1(346,-466)
  Bottom Layer w8: v1(2,120) 2,-27 65.68,-90.68 214.22,-90.68 220,-96.46 U1.20 303.57,-96.46 346,-138.89 v1(346,-466)
DGND: C13.2 C14.2 C15.2 C16.2 C17.2 C18.2 C19.2 C20.2 C21.2 C22.2 C25.2 C26.2 C27.2 C28.2 C29.2 C30.2 C31.2 C32.2 CRY1.2 H1.0@-670,670 H2.0@670,670 H3.0@670,-670 H4.0@-670,-670 HDC.6 HDC.8 HDC.13 HDC.15 HDC.18 HDC.21 HDC.24 HDC.27 HDC.30 HDC.31 P1.4 P2.2 R1.2 R2.1 U1.2 U1.5 U1.14 U1.23 U1.30 U1.61 U2.2 U3.2 | length 1045.5
  Top Layer w10: -67,-482 -66.69,-481.69 CRY1.2 -37.5,-456.5 -37,-457
  Top Layer w15: -109,-485 -107,-487 ; C15.2 C17.2 C14.2 ; C13.2 418.35,-269.65 C22.2 ; C20.2 435.47,217.47 C18.2
  Bottom Layer w10: v1(-193,327) -122.49,327 -96.46,300.97 U1.61 -96.46,208.46 -85.66,197.66 29.66,197.66 41.34,209.34 U1.2 ; v2@-4,-318 48.9,-318 68.9,-298 U1.30 ; 211,-163 227.13,-179.13 U1.23 275.13,-179.13 v1(303,-207)
  other v1: -565,-729 251,-672 -349,-671 -453,-669 -568,-621 -321,-565 -523,-542 612,-523 675,-523 740,-523 -18,-467 203,-461 259,-460 -488,-457 -567,-456 612,-456 680,-456 737,-456 407,-433 -19,-432 233,-428 284,-350 -266,-335 -445,-317 283,-315 -705,-255 655,-243 -653,-199 102,-183 667,-178 -705,-177 666,-122 -702,-113 -639,-109 -4,-65 668,-58 -635,-39 -634,51 305,69 632,110 631,195 -314,265 -496,279 634,297 -279,326 -235,327 -644,352 634,367 -696,370 291,372 291,409 -642,412 484,429 -697,430 400,431 553,445 631,445 -642,475 -354,476 -516,480 -186,505 -258,506 -736,516 705,516 622,517 -736,567 522,590 451,593 -180,605 -274,609 -459,614 -27,616 -542,617 525,665 452,666 -540,674 -458,680 523,734 -540,742 -460,742 -350,754
  other v2: -5,-310 -531,-51 -535,33 -531,100
DOVDD_1.8V: C20.1 C21.1 C22.1 C29.1 C31.1 C32.1 CRY1.4 R4.1 R5.1 R6.1 U1.7 U1.21 U3.5 | length 3764
  Top Layer w10: v1(-293,440) -259,440 R6.1 ; C32.1@-215,-392 CRY1.4@-154.81,-392 ; v3@-185,-502 -185,-393 ; CRY1.4@-163.5,-393.5 CRY1.4@-138,-393.5 ; v3@321,297 344,274 C21.1 367,273 C20.1 C20.1@368,216 ; C22.1@352,-150 353,-149 353,-140 316,-140 v1(300.02,-124.02) 320.03,-104 v1(370,-104)
  Top Layer w15: v3(483,-418) 513,-448 R5.1 R4.1
  Top Layer w20: U3.5 -319.19,-504.24 C31.1 -313.05,-502 -185,-502 v3(-184,-502) ; v3(483,-115) 559,-39 559,236 v3@492.5,302.5
  Bottom Layer w10: v1(-293,440) -264,469 317,469 353,433 353,303 ; U1.7 179.13,290.13 192,303 v3(314,303) ; U1.21@279.98,-124.02 U1.21 v1(300.02,-124.02) ; v1(370,-104) 472,-104 v3(483,-115)
  Bottom Layer w20: v3@-178,-496 v3(-184,-502) 399,-502 v3(483,-418) v3(483,-115) ; v3(314,303) 353,303 v3@492,303
  other v3: 490,302
DVDD_1.5V: C13.1 C14.1 C15.1 C16.1 C17.1 C18.1 C19.1 R3.2 U1.1 U1.6 U1.22 U1.24 U1.28 U1.31 | length 3028
  Top Layer w10: C19.1 -106,376 v1(-86,396) ; C15.1 186,-215 v1(207,-194) ; C17.1 175,-153 v1(205,-123) ; C14.1 C14.1@175,-95 ; v1@306,-270 C13.1 ; v1(306,-166.47) C16.1 ; 320,336 367.47,336 C18.1 393.82,334 400.65,327.17 400.65,239.55 400.35,239.24 400.35,189.11 418.45,171 492,171 522,141 522,-24 436.69,-109.31 399.69,-109.31 385.35,-123.65 385.35,-178.18 C16.1 ; C16.1@351.53,-206.42 C16.1 ; C16.1@351.76,-212.24 C16.1@352,-212.47
  Top Layer w20: C15.1 C17.1 C14.1 ; R3.2 C13.1 C16.1@352,-212.47
  Bottom Layer w10: v1@-87.53,396 -111,419.47 -111,442 -100,453 289,453 320,422 320,336 201,336 151.57,286.57 U1.6 ; v1(-86,396) -44,396 13.78,338.22 U1.1 ; U1.31 41.34,-159.66 77,-124 204.76,-124 v1@205,-124.24 ; U1.28 124.02,-204.98 135,-194 v1(207,-194) 219.69,-206.69 U1.24 305,-258.74 v1(305,-269) ; v1(205,-123) v1@205,-124.24 ; U1.22@231.57,-151.57 U1.22 ; v1(306,-166.47) 291.1,-151.57 U1.22 ; v1@205,-124.24 205,-130 226.57,-151.57 U1.22
  other v1: 320,348
I2C_SCL: HDC.10 P2.3 R4.2 U1.34 | length 2566
  Top Layer w10: HDC.10 -108.27,621.27 -28,541 -28,-131 -11,-148 v1(-6,-148) ; P2.3 447,-673 R4.2
  Bottom Layer w10: v1(-6,-148) -41.34,-183.34 U1.34 -41.34,-281.34 -114,-354 -211,-354 -259,-402 -259,-733 -225,-767 353,-767 P2.3
I2C_SDA: HDC.9 P2.4 R5.2 U1.33 | length 2595.6
  Top Layer w10: v1(-148,-667) -148,-745 -126,-767 323.4,-767 354,-736.4 354,-666 P2.4 400,-512 R5.2 ; HDC.9 -127.95,611.95 -44,528 -44,-192 -31,-205 v1(-13,-205)
  Bottom Layer w10: v1(-148,-667) -227,-667 -243,-651 -243,-408.63 -204.37,-370 -104,-370 -13.78,-279.78 U1.33 -13,-252.17 v1(-13,-205)
NetR2_2: R2.2 U1.25 | length 267.1
  Top Layer w10: v1(311,-393) 349,-393 R2.2
  Bottom Layer w10: U1.25 206.69,-359.69 240,-393 v1(311,-393)
NetR6_2: R6.2 U1.64 | length 397.2
  Top Layer w10: v1(-292,387) -283,378 R6.2
  Bottom Layer w10: v1(-292,387) -109.53,387 -95.53,373 -94.99,373 -13.78,291.79 U1.64
PIXVDD_3.3V: C8.1 C9.1 C10.1 C11.1 C12.1 C24.2 L2.1 U1.44 U1.48 U1.50 U1.53 | length 1715.6
  Top Layer w10: C11.1 -415,-160 v1(-415,-124) ; v1(-415,124) C10.1 ; C12.1 -355,-119 v1(-304,-68) v1@-305,-68 ; C9.1 -355,119 v1(-309,73)
  Top Layer w15: C8.1 C11.1 C12.1 -296,-161 -275,-140 -275,163 ; C11.1@-415,-160 C11.1@-413.98,-158.98 ; C10.1 C9.1 -277,161 -275,163 ; L2.1@-415,347 -355,347 -347,347 -275,275 -275,163
  Bottom Layer w10: v1(-415,-124) U1.44 ; v1(-415,124) U1.53 ; v1(-309,73) -277.34,41.34 U1.50 ; v1(-304,-68) -304,-40 -277.78,-13.78 U1.48
SYS_CLK: CRY1.3 U1.29 | length 279.8
  Top Layer w10: CRY1.3 -26.5,-393.5 ; -26,-393 -26.5,-393.5 ; v1(-4,-350) -4,-371 -26.5,-393.5
  Bottom Layer w10: v1(-4,-350) 77,-350 96.46,-330.54 U1.29
TRIGGER0: P1.3 U1.62 | length 768.3
  Bottom Layer w8: P1.3 -642,200 -491,351 -114.54,351 -107.54,344 -107,344 -69,306 -68.9,305.9 -68.9,296.9 U1.62
TRIGGER1: P1.2 U1.63 | length 890.6
  Top Layer w8: P1.2 -647,156 v2(-647,235)
  Bottom Layer w8: v2(-647,235) -636,235 -506,365 -108.74,365 -101.74,358 -101.2,358 -41.34,298.14 U1.63
VCC_3.3V: C26.1 C28.1 C30.1 HDC.2 HDC.3 HDC.4 HDC.7 L1.1 L2.2 P1.1 P2.1 U2.1 U2.3 U3.1 U3.3 | length 1107.5
  Top Layer w10: v1(-273,657) -265.75,664.25 HDC.2 ; v1(-246.06,642) HDC.3 ; HDC.4 -226.38,664.38 v1(-217,655) ; v1(-167.32,658.68) HDC.7
  Top Layer w30: C30.1 -686.82,-434.05 C28.1 ; v4(-642,-313) -640,-315 C28.1 ; U3.3 -561.07,-363.07 -550,-352 -500,-352 -486.26,-365.74 U3.1 ; U3.3@-561.07,-387.24 C28.1 ; L1.1 -445,413 ; v4(-446,468) -446,414 -445,413 ; L2.2 -445,413 ; v4(710,52) 710,-8 C26.1 ; U2.1 742.67,-161.33 761,-143 761,-100 747.53,-86.53 U2.3 712,-82.34 C26.1 ; C26.1@718,-4 C26.1
VREFH: C35.1 C36.1 U1.43 U1.54 | length 427
  Top Layer w10: v1@-192,-98 C35.1 C36.1 -189,52 v1(-189,79) ; v1@-184,79 v1@-184,80
  Bottom Layer w10: U1.43 -226.1,-151.57 -192,-117.47 v1(-192,-99) ; U1.54 -219.57,151.57 -205,137 -205,95 v1(-189,79)
VREFN: C33.1 C34.1 U1.42 U1.55 | length 668.2
  Top Layer w10: C34.1 -199,-165 v1(-199,-167) -216,-150 -216,176.27 v1(-213.13,179.13) -213.13,178.51 -188,153.37 -188,111 C33.1 C33.1@-146,72.11
  Bottom Layer w10: U1.42 -214.13,-179.13 v1@-202,-167 ; U1.55 v1(-213.13,179.13)
VREFN1: C37.1 C38.1 U1.41 U1.56 | length 742.8
  Top Layer w10: C37.1 -169,-172 -199,-202 -222,-202 -239,-185 -239,185.79 -222.66,202.13 -197.87,202.13 v1(-196,204) -194,204 -178.65,188.65 -178.65,166.65 -146,134 C38.1 C38.1@-146,132.11
  Bottom Layer w10: U1.41 v1@-208.69,-206.69 ; U1.56 -198.69,206.69 v1(-196,204) ; v1@-205.69,-206.69 v1@-201,-202
  other v1: -204,-202
VREFN2: C39.1 C40.1 U1.40 U1.57 | length 775.2
  Top Layer w10: v1(-231,253) v1@-232,252 ; C40.1@-152,-236 -216,-236 v1(-234,-254) -255,-233 -255,229 v1@-232,252 ; C39.1 -199,252 v1@-232,252
  Bottom Layer w10: v1(-234,-254) -232.95,-252.95 U1.40 ; v1(-231,253) v1(-231,253) U1.57
pads on no net: CRY1.1 H1.0@-610.94,670 H1.0@-628.27,628.27 H1.0@-628.27,711.73 H1.0@-670,610.94 H1.0@-670,729.06 H1.0@-711.73,628.27 H1.0@-711.73,711.73 H1.0@-729.06,670 H2.0@610.94,670 H2.0@628.27,628.27 H2.0@628.27,711.73 H2.0@670,610.94 H2.0@670,729.06 H2.0@711.73,628.27 H2.0@711.73,711.73 H2.0@729.06,670 H3.0@610.94,-670 H3.0@628.27,-628.27 H3.0@628.27,-711.73 H3.0@670,-610.94 H3.0@670,-729.06 H3.0@711.73,-628.27 H3.0@711.73,-711.73 H3.0@729.06,-670 H4.0@-610.94,-670 H4.0@-628.27,-628.27 H4.0@-628.27,-711.73 H4.0@-670,-610.94 H4.0@-670,-729.06 H4.0@-711.73,-628.27 H4.0@-711.73,-711.73 H4.0@-729.06,-670 H5.0 H5.1 H6.0 H6.1 HDC.1 HDC.5 HDC.11 HDC.14 U1.32 U1.35 U1.36 U1.37 U1.47 U2.4 U3.4

## Polygon pours and split planes (outlines as drawn)
DGND on Top Layer "Mechanical 1-No Net" (solid, remove dead copper, pour order 1001): -787,-648 -787,648 -785,650 -648,787 648,787 787.5,647.5 787.5,-648.5 649,-787 -648,-787
DGND on Bottom Layer "Mechanical 1-No Net 1" (solid, remove dead copper, pour order 1000): -787,-648 -787,648 -785,650 -648,787 648,787 787.5,647.5 787.5,-648.5 649,-787 -648,-787
VCC_3.3V on VCC_3.3V (split plane): 757.31,607.22 757.31,-607.22 607.22,-757.31 -607.22,-757.31 -757.31,-607.22 -757.31,607.22 -607.22,757.31 607.22,757.31
DGND on InternalPlane2 (split plane): 767.3,611.36 767.3,-611.36 611.36,-767.3 -611.36,-767.3 -767.3,-611.36 -767.3,611.36 -611.36,767.3 611.36,767.3

## Keep-outs
Keep-Out Layer:
  the board outline again, w8

## Silkscreen, mask and mechanical layers (free items; w line width, h text height)
Top Overlay:
  text "UC-521" at 660,466 h120 r270
  text "Rev.A" at 555,413 h80 r270
  text "GND" at -658,277 h60
  text "Tri0" at -658,180 h60
  text "Tri1" at -658,80 h60
  text "VCC" at -658,-23 h60
Bottom Overlay:
  circle w39.37: c393.85,0 r72.83
  circle w51.18: c-393.55,0 r72.83
  lines w62.99: -303.15,-303.15 -303.15,303.15 303.15,303.15 303.15,-303.15 -303.15,-303.15
Mechanical 1:
  the board outline again, w8
Mechanical 2:
  circle w8: c609.72,187.63 r12.59
  circle w10: c670,670 r41.34
  circle w10: c670,-670 r41.34
  circle w10: c-670,-670 r41.34
  circle w10: c-670,670 r41.34
  circle w10: c393.7,0 r41.34
  circle w10: c-393.7,0 r41.34
  lines w7.87: 626.63,156.11 626.63,85.71 ; 627.06,156.11 646.93,136.24 653.4,142.72 627.92,168.2 ; 627.06,168.2 587.76,168.2 562.28,142.72 568.32,136.67 588.19,156.54 588.19,85.71 602.01,85.71 602.01,112.48 612.81,112.48 612.81,85.71 626.63,85.71 ; 626.63,85.71 626.63,85.71 ; 545,68 545,213.55 673.27,213.55 673.27,68 545,68
  lines w8: -787.4,-647.6 -787.4,647.6 -647.6,787.4 647.6,787.4 787.4,647.6 787.4,-647.6 647.6,-787.4 -647.6,-787.4 -787.4,-647.6
  lines w62.99: -303.15,-303.15 303.15,-303.15 303.15,303.15 -303.15,303.15 -303.15,-303.15

## Dimensions
670,674 to -670,654 on Mechanical 2
-690,-670 to -684,670 on Mechanical 2
670,670 to 811,759 on Mechanical 2
393.7,-6 to -393.7,-23 on Mechanical 2
-670,-670 to -787.4,-647.6 on Mechanical 2
-670,-670 to -647.6,-787.4 on Mechanical 2
-647.6,787.4 to -647.6,-787.4 on Mechanical 2
-787.4,647.6 to 787.4,647.6 on Mechanical 2

## Text inside footprints (layer, text, board x,y; h text height)
HDC: Top Overlay "30" at 401,702 h60; Top Overlay "1" at -417,695 h60
P2: Bottom Overlay "1" at 579,-771 h50; Bottom Overlay "2" at 579,-598 h50; Bottom Overlay "21" at -558,-771 h50; Bottom Overlay "22" at -558,-599 h50